# EAGLE board AB+DC-DC (EAGLE 9.4.2), part 1 of 2
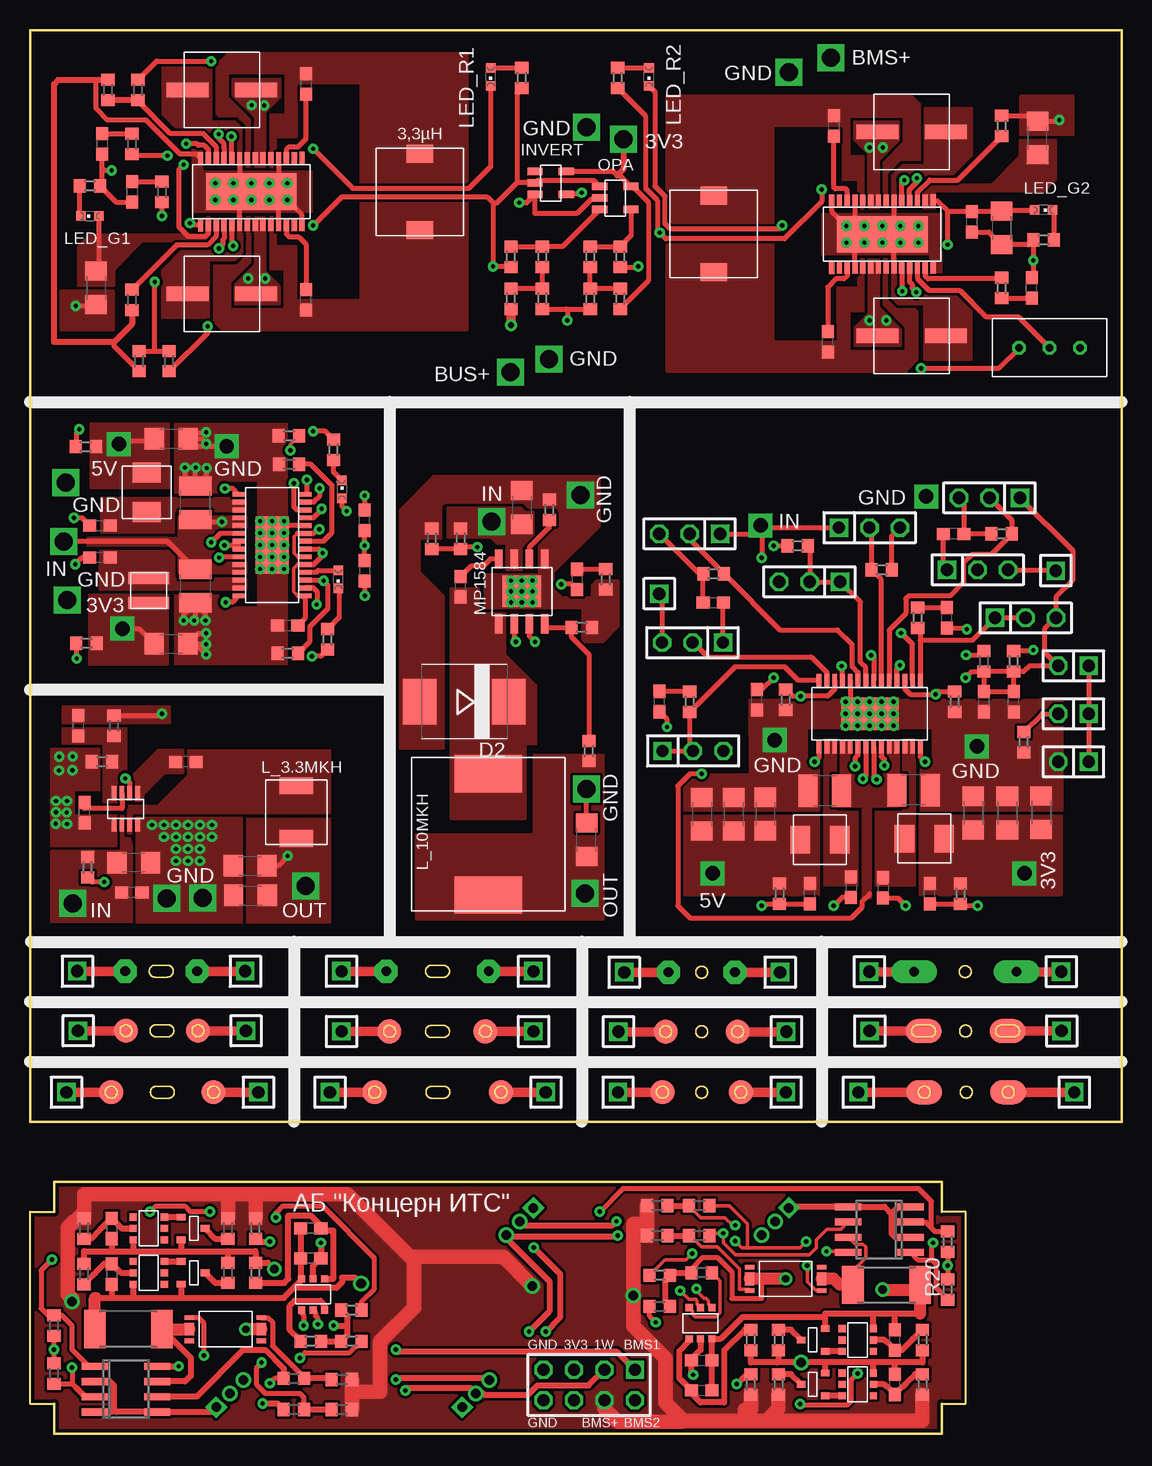
[diagram p0: board, top side]
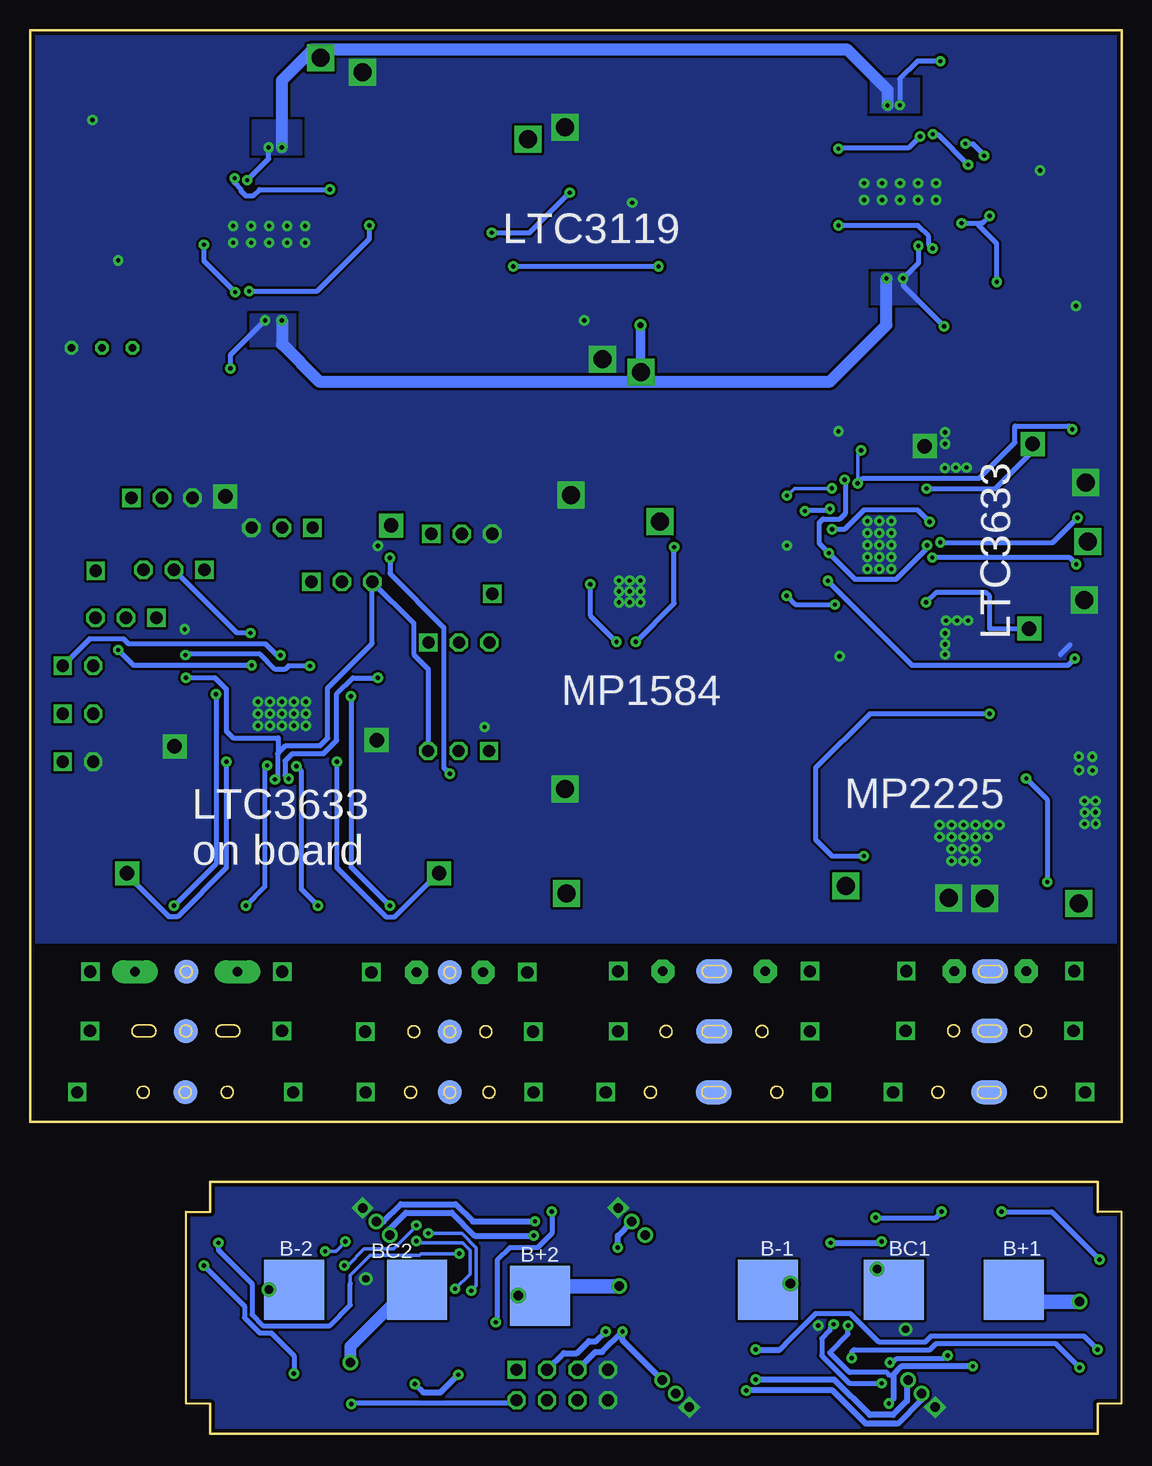
[diagram p1: board, bottom side, seen from below]

Size 91 x 117 mm. Coordinates in mm from the lower left corner, seen from the top.
Outline: 0,26 91,26 91,117 0,117 0,26
Outline: 76,0 76,2.5 78,2.5 78,18.5 76,18.5 76,21 2,21 2,18.5 0,18.5 0,2.5 2,2.5 2,0 76,0
Copper layers (1*16): Top 0.035mm / dielectric 1.5mm / Bottom 0.035mm
Design rules "default *": minimum track width 0.3mm, minimum drill 0.35mm, track to track 0.22mm, track to pad 0.22mm, pad to pad 0.2mm, via to via 0.22mm, smd to smd 0.22mm, copper to edge 0.3mm, drill to drill 8mil, minimum pad ring 0.25mm, minimum via ring 0.25mm, stop-mask expansion 4mil, vias tented up to drill 0mil, thermal gap 10mil

## Footprints (pad centres in the part's own frame; a part is rotated, then mirrored left to right if it is on the bottom)
B82472G6 = smd 1.5 x 2.2: 1 -3.2,0; 2 3.2,0
2X04 = drill 1.016 square: 1 -3.81,-1.27 | drill 1.016 octagon: 2 -3.81,1.27; 3 -1.27,-1.27; 4 -1.27,1.27; 5 1.27,-1.27; 6 1.27,1.27; 7 3.81,-1.27; 8 3.81,1.27
BATTERY = smd 5 x 5: P$1 0,0
C0603 = smd 1.1 x 1: 1 -0.85,0; 2 0.85,0
C1206 = smd 1.6 x 1.8: 1 -1.4,0; 2 1.4,0
C1210 = smd 1.6 x 2.7: 1 -1.4,0; 2 1.4,0
ECAP150 = smd 1.2 x 3.5: P$1 0,2.85; P$2 0,-2.85
ECAP220 = smd 1.2 x 3.5: P$1 0,2.85; P$2 0,-2.85
SMC = smd 2.8 x 3.8: A 3.7,0; C -3.7,0
CONNECT1X3 = drill 0.8 pad 1.2 square: 1 -1.6,0 | drill 0.8 pad 1.2: 2 0,0; 3 1.6,0
SOT23-5 = smd 0.635 x 1.27: P$1 -0.95,-1.3; P$2 0,-1.3; P$3 0.95,-1.3; P$4 0.95,1.3; P$5 -0.95,1.3
1X02 = drill 1.016 square: 1 -1.27,0 | drill 1.016 octagon: 2 1.27,0
1X03 = drill 1.016 square: 1 -2.54,0 | drill 1.016 octagon: 2 0,0; 3 2.54,0
1X01 = drill 1.016 square: 1 0,0
CHIPLED_0603 = smd 0.8 x 0.8: A 0,-0.75; C 0,0.75
R0603 = smd 1 x 1.1: 1 -0.85,0; 2 0.85,0
R2512 = smd 1.8 x 3.2: 1 -2.8,0; 2 2.8,0
FS8205A- = smd 0.4 x 0.8: 1 -0.975,-3; 4 0.975,-3; 5 0.975,3; 8 -0.975,3 | smd 1.05 x 0.8: 23 0,-3; 67 0,3
SOIC8 = smd 0.6 x 2.2: 1 -1.905,-2.6; 2 -0.635,-2.6; 3 0.635,-2.6; 4 1.905,-2.6; 5 1.905,2.6; 6 0.635,2.6; 7 -0.635,2.6; 8 -1.905,2.6
SOT23-6 = smd 0.6 x 0.6: 1 -0.95,-1.3; 2 0,-1.3; 3 0.95,-1.3; 4 0.95,1.3; 5 0,1.3; 6 -0.95,1.3
SOT23-3 = smd 0.56 x 0.73: 1 -0.95,-1; 2 0.95,-1; 3 0,1
LTC3633+VIA = smd 0.4 x 1.05: 1 -4.225,-2.775; 2 -3.575,-2.775; 3 -2.925,-2.775; 4 -2.275,-2.775; 5 -1.625,-2.775; 6 -0.975,-2.775; 7 -0.325,-2.775; 8 0.325,-2.775; 9 0.975,-2.775; 10 1.625,-2.775; 11 2.275,-2.775; 12 2.925,-2.775; 13 3.575,-2.775; 14 4.225,-2.775; 15 4.225,2.775; 16 3.575,2.775; 17 2.925,2.775; 18 2.275,2.775; 19 1.625,2.775; 20 0.975,2.775; 21 0.325,2.775; 22 -0.325,2.775; 23 -0.975,2.775; 24 -1.625,2.775; 25 -2.275,2.775; 26 -2.925,2.775; 27 -3.575,2.775; 28 -4.225,2.775 | smd 4.75 x 2.74: HEAT 0,0 | drill 0.35 pad 0.813: P$1 -2,1; P$2 -1,1; P$3 0,1; P$4 1,1; P$5 2,1; P$6 2,0; P$7 1,0; P$8 0,0; P$9 -1,0; P$10 -2,0; P$11 -2,-1; P$12 -1,-1; P$13 0,-1; P$14 1,-1; P$15 2,-1
MP1584+VIA = smd 0.61 x 1.6: P$1 -1.905,-2.7; P$2 -0.635,-2.7; P$3 0.635,-2.7; P$4 1.905,-2.7; P$5 1.905,2.7; P$6 0.635,2.7; P$7 -0.635,2.7; P$8 -1.905,2.7 | smd 3.21 x 2.62: P$9 0,0 | drill 0.35: P$10 -0.9,0.9; P$11 0,0.9; P$12 0.9,0.9; P$13 -0.9,0; P$14 0,0; P$15 0.9,0; P$16 -0.9,-0.9; P$17 0,-0.9; P$18 0.9,-0.9
VLS3012HBX = smd 1 x 3.4: P$1 -1.05,0; P$2 1.05,0
SPM4020 = smd 1.65 x 2.3: P$1 -1.65,0; P$2 1.65,0
L_12X12 = smd 3.1 x 5.6: P$1 -5.05,0; P$2 5.05,0
TSOT23-8 = smd 0.4 x 1.2: P$1 -0.975,-1.3; P$2 -0.325,-1.3; P$3 0.325,-1.3; P$4 0.975,-1.3; P$5 0.975,1.3; P$6 0.325,1.3; P$7 -0.325,1.3; P$8 -0.975,1.3
L_SPM5020 = smd 1.4 x 2.8: P$1 -2.2,0; P$2 2.2,0
L_SPM4020 = smd 1.65 x 2.3: P$1 -1.65,0; P$2 1.65,0
GRAFIT1 = smd 2 x 3 bottom: OUT 0,0 | drill 0.8 pad 1.93 octagon: P$1 0,-3; P$2 0,3
GRAFIT1_1 = smd 2 x 3 bottom: OUT 0,0 | smd 2 x 2: P$1 0,3; P$2 0,-3
GRAFIT1_2 = smd 2 x 3 bottom: OUT 0,0 | smd 2 x 2: P$1 0,4.27; P$2 0,-4.27
GRAFIT2 = smd 2 x 3 bottom: OUT 0,0 | drill 0.8 pad 1.93 octagon: P$1 0,-4.27; P$2 0,4.27
GRAFIT2_1 = smd 2 x 3 bottom: OUT 0,0 | smd 2 x 2: P$1 0,4; P$2 0,-4
GRAFIT2_2 = smd 2 x 3 bottom: OUT 0,0 | smd 2 x 2: P$1 0,5.27; P$2 0,-5.27
GRAFIT3 = smd 2 x 2 bottom: OUT 0,0 | drill 0.8 pad 1.93 octagon: P$1 0,-2.77; P$2 0,2.77
GRAFIT3_1 = smd 2 x 2 bottom: OUT 0,0 | smd 2 x 2: P$1 0,3; P$2 0,-3
GRAFIT3_2 = smd 2 x 2 bottom: OUT 0,0 | smd 2 x 2: P$1 0,3.27; P$2 0,-3.27
GRAFIT4 = smd 2 x 2 bottom: OUT 0,0 | drill 0.8 pad 1.93 long: P$1 0,-4.27; P$2 0,4.27
GRAFIT4_1 = smd 2 x 2 bottom: OUT 0,0 | smd 2 x 3: P$1 0,3.5; P$2 0,-3.5
GRAFIT4_2 = smd 2 x 2 bottom: OUT 0,0 | smd 2 x 3: P$1 0,3.5; P$2 0,-3.5
LTC3119+VIA = smd 0.45 x 1.05: 1 -4.225,-2.775; 2 -3.575,-2.775; 3 -2.925,-2.775; 4 -2.275,-2.775; 5 -1.625,-2.775; 6 -0.975,-2.775; 7 -0.325,-2.775; 8 0.325,-2.775; 9 0.975,-2.775; 10 1.625,-2.775; 11 2.275,-2.775; 12 2.925,-2.775; 13 3.575,-2.775; 14 4.225,-2.775; 15 4.225,2.775; 16 3.575,2.775; 17 2.925,2.775; 18 2.275,2.775; 19 1.625,2.775; 20 0.975,2.775; 21 0.325,2.775; 22 -0.325,2.775; 23 -0.975,2.775; 24 -1.625,2.775; 25 -2.275,2.775; 26 -2.925,2.775; 27 -3.575,2.775; 28 -4.225,2.775 | smd 7.56 x 3.05: 29 0,0 | drill 0.35 pad 0.813: P$1 -3,0.7; P$2 -1.5,0.7; P$3 0,0.7; P$4 1.5,0.7; P$5 3,0.7; P$6 3,-0.7; P$7 1.5,-0.7; P$8 0,-0.7; P$9 -1.5,-0.7; P$10 -3,-0.7
3296W = drill 0.6 octagon: P$1 -2.54,0; P$2 0,0; P$3 2.54,0

## Placement (x,y rotation side)
3,3µH  3,3µ  [B82472G6]  32.5,103.5 270 top
3,3µH1  3,3µH  [B82472G6]  57,100 90 top
AB1  [2X04]  46.62,4.04 180 top
B+1  BATTERY  [BATTERY]  9,12 0 bottom
B+2  BATTERY  [BATTERY]  48.5,11.5 0 bottom
B-1  BATTERY  [BATTERY]  29.5,12 0 bottom
B-2  BATTERY  [BATTERY]  69,12 0 bottom
BC1  BATTERY  [BATTERY]  19,12 0 bottom
BC2  BATTERY  [BATTERY]  58.75,12 0 bottom
C1  0,1µ  [C0603]  23.4,14.6 180 top
C2  0,1µ  [C0603]  23.4,17.1 180 top
C3  0,1µ  [C0603]  6.8,17.1 270 top
C4  0,1µ  [C0603]  6.8,13.3 270 top
C5  0,1µ  [C0603]  5.84,75.68 0 top
C6  0,1µ  [C0603]  5.84,73.02 180 top
C7  22µ  [C1206]  11.76,65.83 0 top
C8  0,1µ  [C0603]  35.9,70.6 90 top
C9  22µ  [C1206]  46.4,49.5 90 top
C10  10µ  [C1206]  41,77.2 270 top
C11  0,1µ  [C0603]  13,56 180 top
C12  0,1µ  [C0603]  4.55,51.76 90 top
C13  22µ  [C1206]  8.65,47.58 180 top
C14  2,2µ  [C0603]  21.49,67.36 0 top
C15  22µ  [C1206]  11.78,82.93 0 top
C16  47µ  [C1210]  13.78,70.65 270 top
C17  47µ  [C1210]  13.79,77.58 90 top
C18  0,1µ  [C0603]  8.49,45.11 180 top
C19  33p  [C0603]  4,59 270 top
C20  22µ  [C1206]  18.36,47.33 0 top
C21  22µ  [C1206]  18.39,44.86 0 top
C22  220p  [C0603]  52.49,61.02 90 top
C23  220p  [C0603]  76.44,68 90 top
C24  1µ  [C0603]  60.61,61.17 90 top
C25  0,1µ  [C0603]  56,6.1 0 top
C26  0,1µ  [C0603]  56,3.6 0 top
C27  0,1µ  [C0603]  72.1,4.1 90 top
C28  0,1µ  [C0603]  72.1,7.8 90 top
C29  4.7nF  [C0603]  56.97,69.26 0 top
C30  1µ  [C0603]  79.54,61.01 90 top
C31  1µ  [C0603]  82,61 90 top
C32  4.7nF  [C0603]  77,75 180 top
C33  0,1µ  [C0603]  68.45,45.54 270 top
C34  0,1µ  [C0603]  71.11,45.49 270 top
C35  10p  [C0603]  65,45 90 top
C36  220p  [C0603]  45.6,71.2 270 top
C37  10p  [C0603]  75,45 90 top
C38  22µ  [C1206]  61.29,51.65 270 top
C39  22µ  [C1206]  58.65,51.63 270 top
C40  22µ  [C1206]  78.64,51.72 270 top
C41  22µ  [C1206]  81.48,51.72 270 top
C42  10µ  [C1206]  56.01,51.63 270 top
C43  10µ  [C1206]  84.3,51.75 270 top
C44  4.7nF  [C0603]  27.9,71.92 270 top
C45  4.7nF  [C0603]  27.9,76.12 90 top
C46  47µ  [C1210]  73.66,53.64 180 top
C47  47µ  [C1210]  66.25,53.59 0 top
C48  0,1µ  [C0603]  23,94.5 90 top
C49  0,1µ  [C0603]  23,112.5 270 top
C50  680p  [C0603]  6,107.5 270 top
C51  4.7µ  [C1206]  5.5,95.5 270 top
C52  3,3n  [C0603]  8.5,103.5 270 top
C53  150µ  [ECAP150]  16,112 270 top
C54  220µ  [ECAP220]  16,95 270 top
C55  0,1µ  [C0603]  67,109 270 top
C56  0,1µ  [C0603]  66.5,91 90 top
C57  680p  [C0603]  83.5,95.5 90 top
C58  4.7µ  [C1206]  84,108 90 top
C59  150µ  [ECAP150]  73.5,91.5 90 top
C60  220µ  [ECAP220]  73.5,108.5 90 top
C61  0,1µ  [C0603]  78.5,101 270 top
C62  10µ  [C1206]  81,100.5 270 top
D2  [SMC]  36.2,61 180 top
DS18B20  CONNECT1X3  [CONNECT1X3]  37.17,3.33 45 top
DS18B20A  CONNECT1X3  [CONNECT1X3]  40.83,17.67 225 top
DS18B20B  CONNECT1X3  [CONNECT1X3]  16.67,3.33 45 top
DS18B20C  CONNECT1X3  [CONNECT1X3]  62.13,17.67 225 top
INVERT  INVERTER  [SOT23-5]  43.4,104.25 270 top
JP1  [1X02]  87,64 180 top
JP2  [1X02]  87,60 180 top
JP3  [1X02]  87,56 180 top
JP4  [1X03]  55.27,56.9 0 top
JP5  [1X03]  65,71 180 top
JP6  [1X03]  83,68 0 top
JP7  [1X03]  55,75 180 top
JP8  [1X03]  55.24,65.93 180 top
JP9  [1X03]  69.99,75.51 0 top
JP10  [1X03]  80,78 180 top
JP11  [1X03]  79,72 0 top
JP12  [1X01]  85.52,71.92 270 top
JP13  [1X01]  52.46,70 270 top
JP14  [1X01]  41.97,38.53 0 top
JP15  [1X01]  25.97,33.52 0 top
JP16  [1X01]  25,28.45 0 top
JP17  [1X01]  25.97,38.53 0 top
JP18  [1X01]  41.97,33.52 0 top
JP19  [1X01]  43,28.45 0 top
JP20  [1X01]  62.54,38.45 0 top
JP21  [1X01]  49.05,33.5 0 top
JP22  [1X01]  49.02,28.45 0 top
JP23  [1X01]  49.54,38.45 0 top
JP24  [1X01]  63.05,33.5 0 top
JP25  [1X01]  63.02,28.45 0 top
JP26  [1X01]  85.97,38.5 0 top
JP27  [1X01]  70,33.55 0 top
JP28  [1X01]  69.06,28.45 0 top
JP29  [1X01]  69.97,38.5 0 top
JP30  [1X01]  86,33.55 0 top
JP31  [1X01]  87.06,28.45 0 top
JP32  [1X01]  17.94,38.54 0 top
JP33  [1X01]  4,33.57 0 top
JP34  [1X01]  3.04,28.45 0 top
JP35  [1X01]  3.94,38.54 0 top
JP36  [1X01]  18,33.57 0 top
JP37  [1X01]  19.04,28.45 0 top
LED1  [CHIPLED_0603]  25.7,71.2 180 top
LED2  [CHIPLED_0603]  26,78.7 0 top
LED_G1  [CHIPLED_0603]  5,101.5 90 top
LED_G2  [CHIPLED_0603]  84.5,102 270 top
LED_R1  [CHIPLED_0603]  38.4,113.1 180 top
LED_R2  [CHIPLED_0603]  51.6,113.1 180 top
OPA  OPA333  [SOT23-5]  48.8,103 270 top
R1  2k  [R0603]  23.4,7.7 180 top
R2  330R  [R0603]  18.8,17.1 90 top
R3  330R  [R0603]  18.8,13.4 90 top
R4  100R  [R0603]  16.5,17.1 90 top
R5  100R  [R0603]  16.5,13.4 90 top
R6  100R  [R0603]  4.5,17.1 90 top
R7  100R  [R0603]  4.5,13.3 90 top
R8  R05  [R2512]  8.2,8.7 180 top
R9  100R  [R0603]  22,4.6 180 top
R10  100R  [R0603]  22,2 180 top
R11  100k  [R0603]  26,2 180 top
R12  100k  [R0603]  26,4.5 0 top
R13  2k26  [R0603]  2,5 90 top
R14  2k26  [R0603]  2,9 270 top
R15  100R  [R0603]  55.8,16.5 0 top
R16  100R  [R0603]  55.8,19 0 top
R17  100k  [R0603]  52.3,19 0 top
R18  100k  [R0603]  52.3,16.5 180 top
R19  2k26  [R0603]  76.5,16 270 top
R20  2k26  [R0603]  76.5,12 90 top
R21  73,2k  [R0603]  4.66,82.26 0 top
R22  45,3k  [R0603]  4.72,65.88 0 top
R23  10k  [R0603]  21.49,65.04 180 top
R24  10k  [R0603]  21.59,83.17 180 top
R25  162k  [R0603]  21.6,80.8 180 top
R26  2k  [R0603]  25.3,82.01 270 top
R27  200k  [R0603]  43.3,77 270 top
R28  40k2  [R0603]  46,67.2 0 top
R29  124k  [R0603]  46.6,56.9 90 top
R30  100k  [R0603]  35.9,74.6 90 top
R31  2k  [R0603]  24.8,66.2 90 top
R32  24k9  [R0603]  33.5,74.6 90 top
R33  68k1  [R0603]  48,71.2 270 top
R34  100k  [R0603]  4.8,47.2 270 top
R35  8k87  [R0603]  6,56 180 top
R36  40k2  [R0603]  7,59 90 top
R37  10k  [R0603]  82.85,57.62 270 top
R38  13k  [R0603]  55,61 270 top
R39  324k  [R0603]  64,74 180 top
R40  13k  [R0603]  74,68 270 top
R41  1M  [R0603]  56.99,71.67 180 top
R42  100k  [R0603]  79.53,64.36 270 top
R43  100k  [R0603]  82,64.36 270 top
R44  1M  [R0603]  71,72 0 top
R45  1M  [R0603]  81,75 180 top
R46  11k5  [R0603]  63,61.17 270 top
R47  18k7  [R0603]  77.09,61.01 270 top
R48  84k5  [R0603]  62.49,45.01 270 top
R49  2k  [R0603]  56,13.4 0 top
R50  330R  [R0603]  60.1,4.1 270 top
R51  330R  [R0603]  60.1,7.8 270 top
R52  100R  [R0603]  62.4,4.1 270 top
R53  100R  [R0603]  62.4,7.8 270 top
R54  100R  [R0603]  74.4,4.1 270 top
R55  100R  [R0603]  74.4,7.8 270 top
R56  R05  [R2512]  71.4,12.4 0 top
R57  84k5  [R0603]  77.57,44.99 270 top
R58  150k  [R0603]  81,109 270 top
R59  150k  [R0603]  81,95.5 270 top
R60  2k  [R0603]  84.5,99.5 0 top
R61  2k  [R0603]  41,113 90 top
R62  2k  [R0603]  49,113 90 top
R63  910k  [R0603]  40.1,94.6 90 top
R64  330k  [R0603]  42.7,94.6 270 top
R65  1M  [R0603]  11.6,89.4 270 top
R66  10k  [R0603]  11,103.5 270 top
R67  150k  [R0603]  9.1,89.4 90 top
R68  150k  [R0603]  8.5,94.5 90 top
R69  150k  [R0603]  8.5,107.5 90 top
R70  24k3  [R0603]  6.5,112 90 top
R71  51k  [R0603]  46.7,94.6 90 top
R72  232k  [R0603]  9,112 90 top
R73  51k  [R0603]  49.2,94.6 270 top
R74  10k  [R0603]  46.7,98.1 270 top
R75  150k  [R0603]  49.2,98.1 270 top
R76  10k  [R0603]  42.7,98.1 270 top
R77  150k  [R0603]  40.1,98.1 270 top
R94  200k  [R0603]  26.8,10.3 0 top
R95  200k  [R0603]  26.8,7.7 0 top
R98  200k  [R0603]  52.5,13.2 180 top
R99  200k  [R0603]  52.5,10.6 180 top
R100  2k  [R0603]  5,104 180 top
U$1  FS8205A-  [FS8205A-]  63,12.9 270 top
U$2  MOCD217M  [SOIC8]  8,3.7 270 top
U$3  HY2120  [SOT23-6]  23.6,11.6 0 top
U$4  HY2213"  [SOT23-6]  9.9,17.1 270 top
U$5  HY2213"  [SOT23-6]  9.9,13.4 270 top
U$6  SI2302CDS  [SOT23-3]  13.6,17.1 270 top
U$7  SI2302CDS  [SOT23-3]  13.6,13.4 270 top
U$8  LTC3633+VIA  [LTC3633+VIA]  20.19,74.06 90 top
U$9  MP1584+VIA  [MP1584+VIA]  41,70.2 0 top
U$10  MOCD217M  [SOIC8]  70.8,17 90 top
U$11  1µH  [VLS3012HBX]  9.89,70.28 270 top
U$12  SPM4020  [SPM4020]  9.73,78.46 90 top
U$13  L_10MKH  [L_12X12]  38.2,49.95 90 top
U$14  MP2225  [TSOT23-8]  8,52.07 0 top
U$15  L_3.3MKH  [L_SPM5020]  22.2,51.8 90 top
U$16  LTC3633+VIA  [LTC3633+VIA]  70,60 180 top
U$17  L_2.2MKH  [L_SPM4020]  65.85,49.5 0 top
U$18  L_2.2MKH  [L_SPM4020]  74.55,49.6 180 top
U$19  GRAFITGRAFIT1  [GRAFIT1]  10.94,38.54 90 top
U$20  GRAFITGRAFIT1_1  [GRAFIT1_1]  11,33.57 90 top
U$21  GRAFITGRAFIT1_2  [GRAFIT1_2]  11.04,28.45 90 top
U$22  GRAFITGRAFIT2  [GRAFIT2]  33.97,38.53 90 top
U$23  GRAFITGRAFIT2_1  [GRAFIT2_1]  33.97,33.52 90 top
U$24  GRAFITGRAFIT2_2  [GRAFIT2_2]  34,28.45 90 top
U$25  GRAFITGRAFIT3  [GRAFIT3]  56,38.45 90 top
U$26  FS8205A-  [FS8205A-]  16.3,8.7 90 top
U$27  GRAFITGRAFIT3_1  [GRAFIT3_1]  56,33.5 90 top
U$28  GRAFITGRAFIT3_2  [GRAFIT3_2]  56,28.45 90 top
U$29  GRAFITGRAFIT4  [GRAFIT4]  77.97,38.5 90 top
U$30  GRAFITGRAFIT4_1  [GRAFIT4_1]  78,33.55 90 top
U$31  GRAFITGRAFIT4_2  [GRAFIT4_2]  78.06,28.45 90 top
U$32  LTC31191  [LTC3119+VIA]  71.06,99.97 0 top
U$33  32961  [3296W]  85,90.5 180 top
U$45  HY2120  [SOT23-6]  55.9,9.2 180 top
U$46  HY2213"  [SOT23-6]  69,4.1 90 top
U$47  HY2213"  [SOT23-6]  69,7.8 90 top
U$48  SI2302CDS  [SOT23-3]  65.3,4.1 90 top
U$49  SI2302CDS  [SOT23-3]  65.3,7.8 90 top
U$59  LTC31191  [LTC3119+VIA]  18.45,103.53 180 top

## Library data of the parts
3,3µH 3,3µH1 B+1 B+2 B-1 B-2 BC1 BC2 C53 C54 C59 C60 DS18B20 DS18B20A DS18B20B DS18B20C INVERT OPA U$1-U$33 U$45-U$49 U$59 = CanCubeSat
AB1 JP1-JP37 = pinheadCS
C1-C52 C55-C58 C61 C62 = rcl; SPICEPREFIX: C
D2 = diode
LED1 LED2 LED_G1 LED_G2 LED_R1 LED_R2 = led
R1-R7 R9-R55 R57-R77 R94 R95 R98-R100 = resistor
R8 R56 = rcl; SPICEPREFIX: R

## Nets
1.65: R71.2 R73.1 R74.2
1W: AB1.3 DS18B20.2 DS18B20A.2 DS18B20B.2 DS18B20C.2
3.3: INVERT.P$5 OPA.P$5 R73.2
3V1: C9.1 R29.1 U$13.P$1
3V3: AB1.5 DS18B20.3 DS18B20A.3 DS18B20B.3 DS18B20C.3
5V: C15.1 R21.2 U$8.15 U$12.P$2
90: R65.1 R66.2 R67.2 U$59.15
A: INVERT.P$2 OPA.P$1 R61.1 R75.2 R77.2 U$59.18
B-1: B-1.P$1 C1.2 C2.2 C4.2 R8.2 U$3.6 U$5.3 U$7.2
B-2: B-2.P$1 C25.2 C26.2 C28.2 R56.2 U$45.6 U$47.3 U$49.2
BC1: BC1.P$1 C3.2 R3.2 R5.2 R7.2 U$4.3 U$6.2
BC2: BC2.P$1 C27.2 R51.2 R53.2 R55.2 U$46.3 U$48.2
BMS1: AB1.1 R13.2 R14.2
BMS2: AB1.2 R19.2 R20.2
BMS+: AB1.4 B+1.P$1 B+2.P$1 R2.2 R4.2 R6.2 R11.1 R12.2 R17.1 R18.2 R50.2 R52.2 R54.2
BUS+: C16.1 C17.1 U$8.6 U$8.9 U$8.18 U$8.19 U$8.24 U$8.25
FB1: C37.1 R47.1 R57.2 U$16.3
FB2: C35.1 R46.1 R48.2 U$16.12
GND: AB1.7 AB1.8 DS18B20.1 DS18B20A.1 DS18B20B.1 DS18B20C.1 R1.1 R49.1 R94.1 R95.1 R98.1 R99.1 U$1.23 U$2.2 U$2.4 U$2.5 U$10.2 U$10.4 U$10.5 U$26.23
GND1: C7.2 C9.2 C10.1 C12.1 C13.1 C14.1 C15.2 C16.2 C17.2 C18.1 C20.1 C21.1 C22.1 C23.1 C24.1 C29.1 C30.1 C31.1 C32.1 C38.1 C39.1 C40.1 C41.1 C42.1 C43.1 C44.1 C45.1 C46.1 C47.1 C50.2 C51.2 C52.2 C53.P$2 C54.P$2 C57.2 C58.2 C59.P$2 C60.P$2 C61.2 C62.2 D2.A INVERT.P$3 JP3.2 JP7.3 JP9.3 JP10.3 OPA.P$2 R23.2 R24.2 R25.2 R26.1 R27.1 R28.2 R31.1 R32.2 R33.2 R35.2 R37.2 R39.2 R41.2 R44.2 R45.2 R46.2 R47.2 R58.1 R60.1 R64.2 R67.1 R68.1 R70.2 R71.1 R100.1 U$8.10 U$8.HEAT U$8.P$1 U$8.P$2 U$8.P$3 U$8.P$4 U$8.P$5 U$8.P$6 U$8.P$7 U$8.P$8 U$8.P$9 U$8.P$10 U$8.P$11 U$8.P$12 U$8.P$13 U$8.P$14 U$8.P$15 U$9.P$5 U$9.P$9 U$9.P$10 U$9.P$11 U$9.P$12 U$9.P$13 U$9.P$14 U$9.P$15 U$9.P$16 U$9.P$17 U$9.P$18 U$14.P$1 U$14.P$4 U$16.10 U$16.HEAT U$16.P$1 U$16.P$2 U$16.P$3 U$16.P$4 U$16.P$5 U$16.P$6 U$16.P$7 U$16.P$8 U$16.P$9 U$16.P$10 U$16.P$11 U$16.P$12 U$16.P$13 U$16.P$14 U$16.P$15 U$32.4 U$32.9 U$32.14 U$32.20 U$32.25 U$32.28 U$32.29 U$32.P$1 U$32.P$2 U$32.P$3 U$32.P$4 U$32.P$5 U$32.P$6 U$32.P$7 U$32.P$8 U$32.P$9 U$32.P$10 U$33.P$1 U$59.4 U$59.9 U$59.14 U$59.20 U$59.25 U$59.28 U$59.29 U$59.P$1 U$59.P$2 U$59.P$3 U$59.P$4 U$59.P$5 U$59.P$6 U$59.P$7 U$59.P$8 U$59.P$9 U$59.P$10
INA_BMS+: C53.P$1 C60.P$1 R72.2 U$32.19 U$32.22 U$32.23 U$59.6 U$59.7
INA_BUS+: C54.P$1 C59.P$1 R63.1 R65.2 U$32.6 U$32.7 U$33.P$3 U$59.19 U$59.22 U$59.23
INTVCC: C30.2 C31.2 JP1.2 JP4.3 JP5.3 JP6.3 JP10.1 R42.2 R43.2 U$16.22
N$1: R10.1 R11.2 U$26.5
N$2: R9.1 R12.1 U$26.4
N$3: R20.1 R98.2 U$10.1
N$4: C1.1 R2.1 U$3.5
N$5: R49.2 U$45.3
N$6: C3.1 R6.1 U$4.2
N$7: U$4.6 U$6.1
N$8: C4.1 R7.1 U$5.2
N$9: U$5.6 U$7.1
N$10: R16.1 R17.2 U$1.5
N$11: R4.1 U$6.3
N$12: R5.1 U$7.3
N$13: R1.2 U$3.3
N$14: R15.1 R18.1 U$1.4
N$15: C2.1 R3.1 U$3.4
N$16: R25.1 U$8.8
N$17: R14.1 R94.2 U$2.1
N$18: R13.1 R95.2 U$2.3
N$19: R19.1 R99.2 U$10.3
N$20: LED1.C R31.2
N$21: LED2.C R26.2
N$22: LED2.A U$8.11
N$23: C8.2 U$9.P$8
N$24: C14.2 U$8.1 U$8.5 U$8.7 U$8.14 U$8.21 U$8.22
N$25: R22.1 R23.1 U$8.3
N$26: C8.1 D2.C U$9.P$1 U$13.P$2
N$27: R27.2 U$9.P$6
N$28: C6.1 U$8.26 U$8.27 U$11.P$1
N$29: R28.1 R29.2 U$9.P$4
N$30: R30.1 R32.1 U$9.P$2
N$31: C6.2 U$8.23
N$32: C5.1 U$8.20
N$33: C5.2 U$8.16 U$8.17 U$12.P$1
N$34: C10.2 R30.2 U$9.P$7
N$35: C36.1 R33.1
N$36: C36.2 U$9.P$3
N$37: C11.2 U$14.P$5
N$38: C11.1 U$14.P$3 U$15.P$2
N$39: R21.1 R24.1 U$8.12
N$40: C12.2 U$14.P$7
N$41: R34.2 U$14.P$6
N$42: C13.2 C18.2 R34.1 U$14.P$2
N$43: C19.2 R35.1 R36.1 U$14.P$8
N$44: C19.1 C20.2 C21.2 R36.2 U$15.P$1
N$45: JP1.1 JP2.1 JP3.1 U$16.7
N$46: JP2.2 R37.1
N$47: LED1.A U$8.4
N$48: JP4.1 JP4.2 R38.2 U$16.14
N$49: C22.2 R38.1
N$50: JP5.1 JP5.2 R39.1 U$16.8
N$51: JP6.1 JP6.2 R40.2 U$16.1
N$52: C23.2 R40.1
N$53: C24.2 U$16.21
N$54: C33.1 U$16.16 U$16.17 U$17.P$2
N$55: C34.1 U$16.26 U$16.27 U$18.P$2
N$56: JP7.2 R41.1 U$16.9
N$57: R42.1 U$16.11
N$58: JP8.2 U$16.13
N$59: R43.1 U$16.4
N$60: JP9.2 R44.1 U$16.6
N$61: C29.2 JP8.1
N$62: JP10.2 R45.1 U$16.5
N$63: JP11.2 U$16.2
N$64: C32.2 JP11.1
N$65: C33.2 U$16.20
N$66: C34.2 U$16.23
N$67: JP8.3 JP13.1
N$68: JP11.3 JP12.1
N$69: C44.2 U$8.2
N$70: C45.2 U$8.13
N$71: R52.1 U$48.3
N$72: JP14.1 U$22.P$1
N$73: JP15.1 U$23.P$1
N$74: JP16.1 U$24.P$1
N$75: JP17.1 U$22.P$2
N$76: JP18.1 U$23.P$2
N$77: JP19.1 U$24.P$2
N$78: JP20.1 U$25.P$1
N$79: JP21.1 U$27.P$1
N$80: JP22.1 U$28.P$1
N$81: JP23.1 U$25.P$2
N$82: JP24.1 U$27.P$2
N$83: JP25.1 U$28.P$2
N$84: JP26.1 U$29.P$1
N$85: R53.1 U$49.3
N$86: JP27.1 U$30.P$1
N$87: JP28.1 U$31.P$1
N$88: JP29.1 U$29.P$2
N$89: JP30.1 U$30.P$2
N$90: JP31.1 U$31.P$2
N$91: JP32.1 U$19.P$1
N$92: JP33.1 U$20.P$1
N$93: JP34.1 U$21.P$1
N$94: JP35.1 U$19.P$2
N$95: JP36.1 U$20.P$2
N$96: JP37.1 U$21.P$2
N$97: C25.1 R50.1 U$45.5
N$98: R70.1 R72.1 U$59.12
N$99: C27.1 R54.1 U$46.2
N$100: U$46.6 U$48.1
N$101: 3,3µH1.2 C55.1 U$32.21 U$32.24
N$102: U$47.6 U$49.1
N$103: 3,3µH1.1 C56.1 U$32.5 U$32.8
N$104: R58.2 U$32.17
N$105: C55.2 U$32.26
N$106: R59.1 U$32.13
N$107: C26.1 R51.1 U$45.4
N$108: C28.1 R55.1 U$47.2
N$109: C56.2 U$32.3
N$110: U$32.12 U$33.P$2
N$111: C57.1 R59.2
N$112: LED_G1.C R100.2
N$113: LED_G2.C R60.2
N$114: OPA.P$3 R76.1 R77.1
N$115: LED_R1.A R61.2
N$116: LED_R2.A R62.2
N$129: C49.2 U$59.3
N$131: 3,3µH.2 C48.1 U$59.21 U$59.24
N$132: 3,3µH.1 C49.1 U$59.5 U$59.8
N$135: R69.1 U$59.13
N$136: C50.1 R69.2
N$139: C52.1 R66.1
N$142: R68.2 U$59.17
N$144: C48.2 U$59.26
N$215: C58.1 C61.1 C62.1 LED_G2.A U$32.11 U$32.15 U$32.16
N$234: C51.1 LED_G1.A U$59.11 U$59.16
N$302: OPA.P$4 R74.1 R75.1
NO_GND1: R8.1 U$2.7 U$26.67
NO_GND2: R56.1 U$1.67 U$10.7
OC1: R9.2 U$2.6 U$3.2
OC2: R15.2 U$10.6 U$45.2
OD1: R10.2 U$2.8 U$3.1
OD2: R16.2 U$10.8 U$45.1
PGOOD1: LED_R1.C U$59.10
PGOOD2: LED_R2.C U$32.10
RUN: R63.2 R64.1 R76.2
VDD: C7.1 R22.2 U$8.28 U$11.P$2
VIN: C46.2 C47.2 JP7.1 JP9.1 U$16.18 U$16.19 U$16.24 U$16.25
VON1: C37.2 C40.2 C41.2 C43.2 R57.1 U$16.28 U$18.P$1
VON2: C35.2 C38.2 C39.2 C42.2 R48.1 U$16.15 U$17.P$1
Y: INVERT.P$4 R62.1 U$32.18